# EAGLE board CMUcam Bridge (EAGLE 5.11)
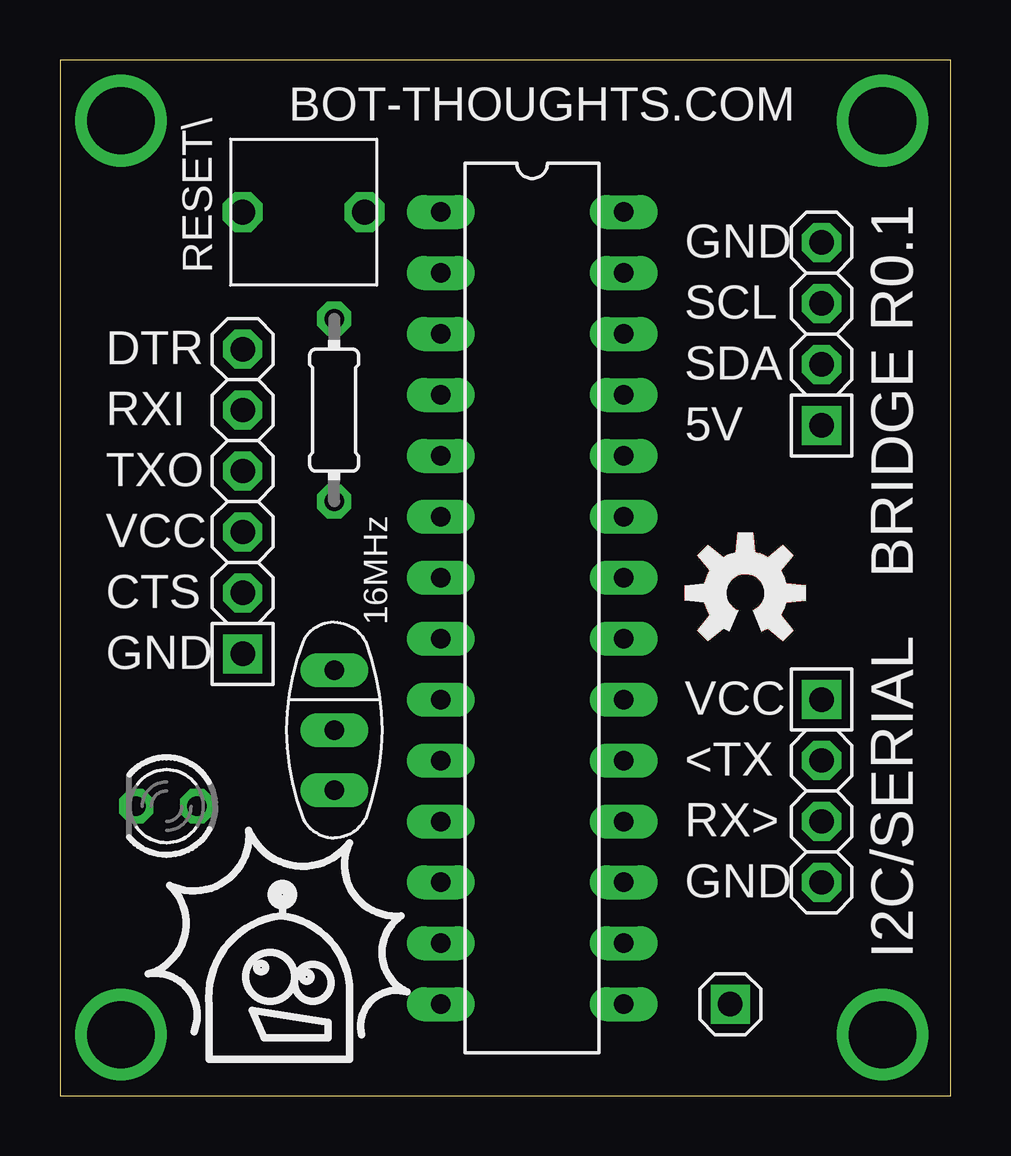
[diagram p0: board, top side]
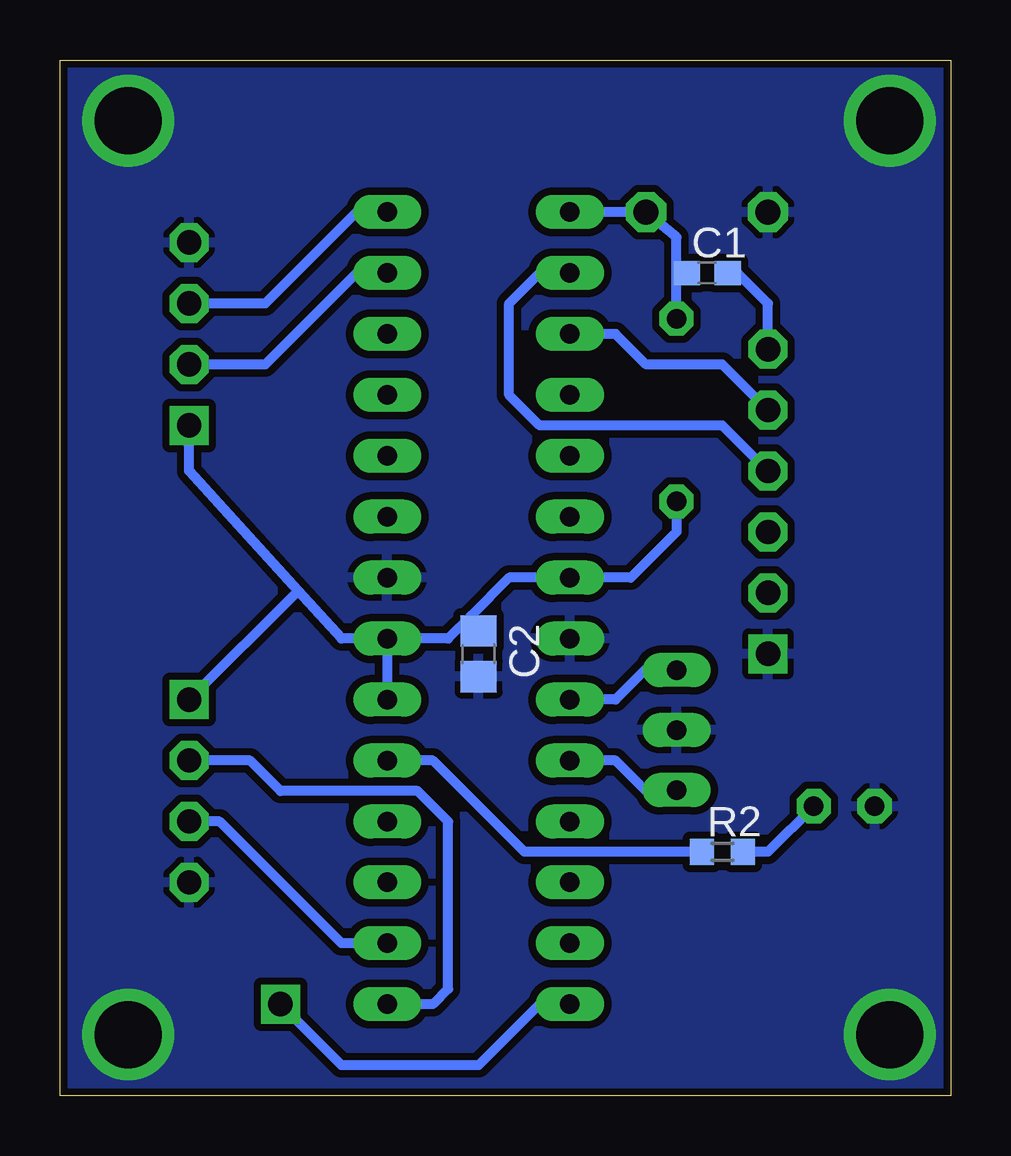
[diagram p1: board, bottom side, seen from below]

Size 37.13 x 43.17 mm. Coordinates in mm from the lower left corner, seen from the top.
Outline: 0,0 37.13,0 37.13,43.17 0,43.17 0,0
Copper layers (1*16): Top 0.035mm / dielectric 1.5mm / Bottom 0.035mm
Design rules "SparkFun": minimum track width 8mil, minimum drill 20mil, track to track 8mil, track to pad 8mil, pad to pad 8mil, via to via 8mil, smd to smd 8mil, copper to edge 10mil, drill to drill 8mil, minimum pad ring 12mil, minimum via ring 10mil, stop-mask expansion 4mil, vias tented up to drill 25mil, thermal gap 10mil

## Footprints (pad centres in the part's own frame; a part is rotated, then mirrored left to right if it is on the bottom)
C0603 = smd 1.1 x 1: 1 -0.85,0; 2 0.85,0
C0805 = smd 1.3 x 1.5: 1 -0.95,0; 2 0.95,0
DIL28-3 = drill 0.813 long: 1 -16.51,-3.81; 2 -13.97,-3.81; 3 -11.43,-3.81; 4 -8.89,-3.81; 5 -6.35,-3.81; 6 -3.81,-3.81; 7 -1.27,-3.81; 8 1.27,-3.81; 9 3.81,-3.81; 10 6.35,-3.81; 11 8.89,-3.81; 12 11.43,-3.81; 13 13.97,-3.81; 14 16.51,-3.81; 15 16.51,3.81; 16 13.97,3.81; 17 11.43,3.81; 18 8.89,3.81; 19 6.35,3.81; 20 3.81,3.81; 21 1.27,3.81; 22 -1.27,3.81; 23 -3.81,3.81; 24 -6.35,3.81; 25 -8.89,3.81; 26 -11.43,3.81; 27 -13.97,3.81; 28 -16.51,3.81
1X04-S = drill 1.016 square: 1 -3.81,0 | drill 1.016 octagon: 2 -1.27,0; 3 1.27,0; 4 3.81,0
1X01-S = drill 1.016 square: 1 0,0
1X06-S = drill 1.016 square: 1 -6.35,0 | drill 1.016 octagon: 2 -3.81,0; 3 -1.27,0; 4 1.27,0; 5 3.81,0; 6 6.35,0
LED3MM = drill 0.813 octagon: A -1.27,0; K 1.27,0
CSTLS_G9 = drill 0.813 long: 1 -2.5,0; 2 0,0; 3 2.5,0
0204/7 = drill 0.813 octagon: 1 -3.81,0; 2 3.81,0
R0603 = smd 1 x 1.1: 1 -0.85,0; 2 0.85,0
EVQ11X09 = drill 1.041 pad 1.676 octagon: 1 0,0; 2 5.08,0

## Placement (x,y rotation side)
C1  0.1uF  [C0603]  10.16,34.29 0 bottom
C2  10uF  [C0805]  19.68,18.41 270 bottom
IC1  ATmega328P  [DIL28-3]  19.68,20.32 270 top
JP1  I2C  [1X04-S]  31.75,31.75 90 top
JP2  CAM  [1X04-S]  31.75,12.7 270 top
JP3  RDY  [1X01-S]  27.94,3.81 0 top
JP4  FTDI  [1X06-S]  7.62,24.77 90 top
LED1  RED  [LED3MM]  4.45,12.06 180 top
Q1  16MHz  [CSTLS_G9]  11.43,15.24 270 top
R1  1K  [0204/7]  11.43,28.57 270 top
R2  330  [R0603]  9.53,10.16 0 bottom
S1  RESET\  [EVQ11X09]  7.62,36.83 0 top
U$2  BOT-THOUGHTS  [BOT-THOUGHTS]  9.53,3.81 0 top

## Library data of the parts
C1 = rcl; PARTNO: CC0603ZRY5V7BB104
C2 = rcl; PARTNO: C1608X5R0J105K
IC1 = atmel; PARTNO: DEV-10524
JP1 JP2 = pinhead-2; PARTNO: 2211S-04G
JP3 = pinhead-2
JP4 = pinhead-2; PARTNO: 2211S-06G
LED1 = led; BOM: EXCLUDE
Q1 = murata-resonators; PARTNO: AWCR-16.00MD
R1 = rcl; BOM: EXCLUDE
R2 = rcl; PARTNO: CRCW0603330RJNEA
S1 = ads4; PARTNO: SALVAGE
U$2 = mes; BOM: EXCLUDE

## Nets
<TX: IC1.15 JP2.2
DTR: C1.2 JP4.6
GND: C2.2 IC1.8 IC1.22 JP1.4 JP2.4 JP4.1 LED1.K Q1.2 S1.1
N$2: IC1.9 Q1.1
N$3: IC1.10 Q1.3
N$4: LED1.A R2.2
N$5: IC1.19 R2.1
N$6: C1.1 IC1.1 R1.1 S1.2
READY: IC1.14 JP3.1
RX>: IC1.16 JP2.3
RXI/TXD: IC1.3 JP4.5
SCL: IC1.28 JP1.3
SDA: IC1.27 JP1.2
TXO/RXD: IC1.2 JP4.4
VCC: C2.1 IC1.7 IC1.20 IC1.21 JP1.1 JP2.1 R1.2

## Tracks (layer width: path | path; a pad name or v marks a point on that pad's centre or on a via)
<TX
  Bottom 0.406: IC1.15 21.59,3.81 20.95,4.45 20.95,11.43 22.23,12.7 27.94,12.7 29.21,13.97 JP2.2
DTR
  Bottom 0.406: JP4.6 7.62,33.02 8.89,34.29 C1.2
GND  (via drill 2.8)
  other vias: 2.54,40.64 34.29,40.64 34.29,2.54 2.54,2.54
  pour Bottom (isolate 0.305): 0,43.18 36.83,43.18 36.83,0 0,0
N$1
  Top 0: 29.24,19.34 arc10 29.5,19.47 30.14,18.95 30.58,19.39 30.06,20.03 arc19 30.28,20.56 31.1,20.64 31.1,21.27 30.28,21.35 arc19 30.06,21.88 30.58,22.52 30.14,22.96 29.5,22.44 arc19 28.97,22.66 28.88,23.48 28.27,23.48 28.18,22.66 arc19 27.65,22.44 27.01,22.96 26.57,22.52 27.09,21.88 arc19 26.87,21.35 26.05,21.27 26.05,20.64 26.87,20.56 arc19 27.09,20.03 26.57,19.39 27.01,18.95 27.65,19.47 arc10 27.91,19.34 28.27,20.22 arc-68 27.78,20.95 arc-247 28.88,20.22 29.24,19.34
N$2
  Bottom 0.406: IC1.9 13.97,16.51 12.7,17.78 11.47,17.78 Q1.1
N$3
  Bottom 0.406: IC1.10 13.97,13.97 12.7,12.7 11.39,12.7 Q1.3
N$4
  Bottom 0.406: LED1.A 7.62,10.16 R2.2
N$5
  Bottom 0.406: R2.1 17.78,10.16 21.59,13.97 IC1.19
N$6
  Bottom 0.406: IC1.1 14.39,36.83 S1.2 11.43,35.77 11.43,34.29 | R1.1 11.43,34.29 | C1.1 11.21,34.51 11.43,34.29
READY
  Bottom 0.406: IC1.14 17.14,3.81 19.68,1.27 25.4,1.27 JP3.1
RX>
  Bottom 0.406: JP2.3 30.48,11.43 25.4,6.35 IC1.16
RXI/TXD
  Bottom 0.406: JP4.5 9.53,30.48 12.7,30.48 13.97,31.75 IC1.3
SCL
  Bottom 0.406: IC1.28 24.77,36.83 28.57,33.02 JP1.3
SDA
  Bottom 0.406: JP1.2 28.57,30.48 24.77,34.29 IC1.27
TXO/RXD
  Bottom 0.406: IC1.2 17.14,34.29 18.41,33.02 18.41,29.21 17.14,27.94 13.34,27.94 12.06,27.94 9.53,27.94 JP4.4
VCC
  Bottom 0.406: 20,20 18.41,21.59 IC1.7 13.34,21.59 11.43,23.5 R1.2 | 20,20 20.95,19.05 IC1.21 | IC1.21 IC1.20 | IC1.21 25.4,19.05 27.21,21.04 | 27.21,21.04 31.75,26.04 JP1.1 | JP2.1 27.21,21.04 | C2.1 19.68,19.68 20,20

## Text on the board
tNames: BOT-THOUGHTS.COM | GND | SCL | DTR | SDA | RXI | 5V | TXO | VCC | BRIDGE R0.1 | CTS | GND | VCC | <TX | RX> | GND | I2C/SERIAL